# Altium PCB PCB.PcbDoc
Units mm, origin at the board's own origin, x right, y up, seen from the top; angles counter-clockwise.
Board outline 54.94 x 41.1 mm, 2 copper layers (Top Layer, Bottom Layer); 39 components, 25 nets, 145 pads, 84 vias.
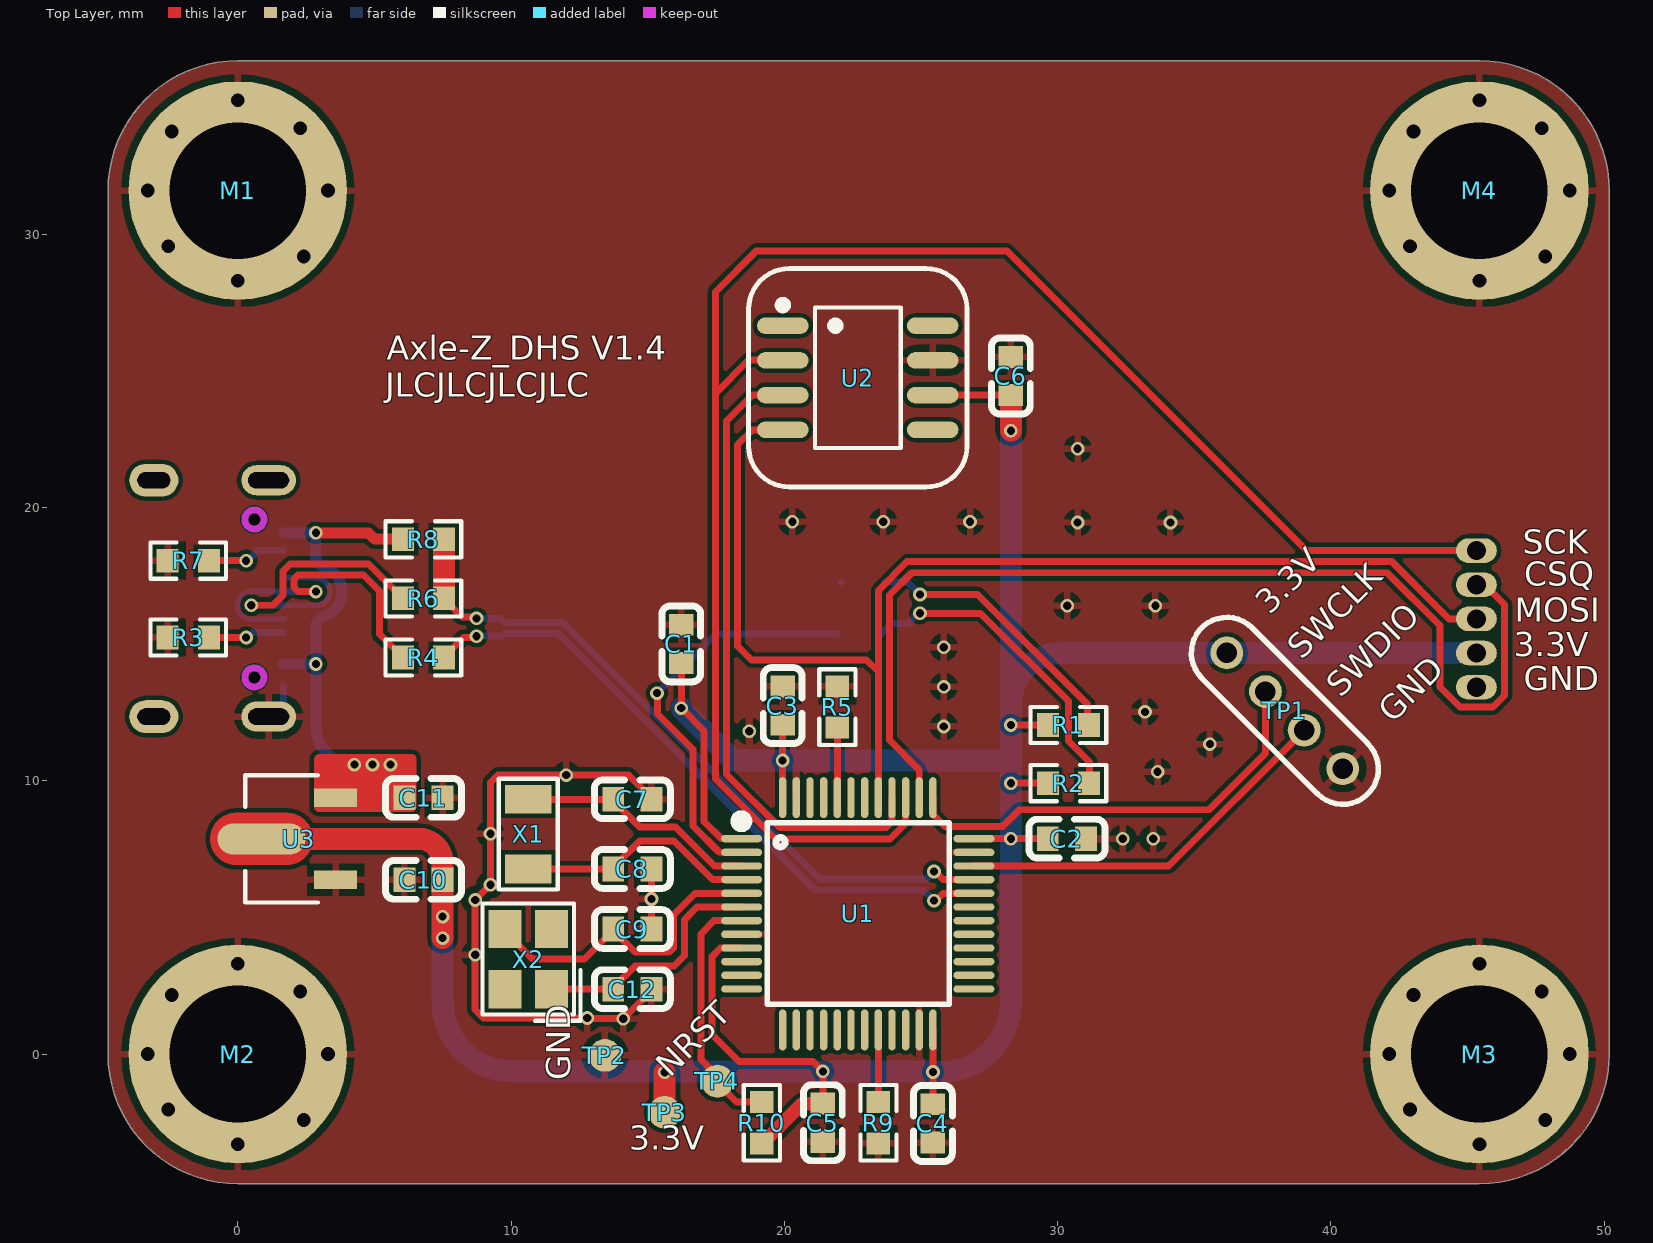
[diagram p0: Top Layer view]
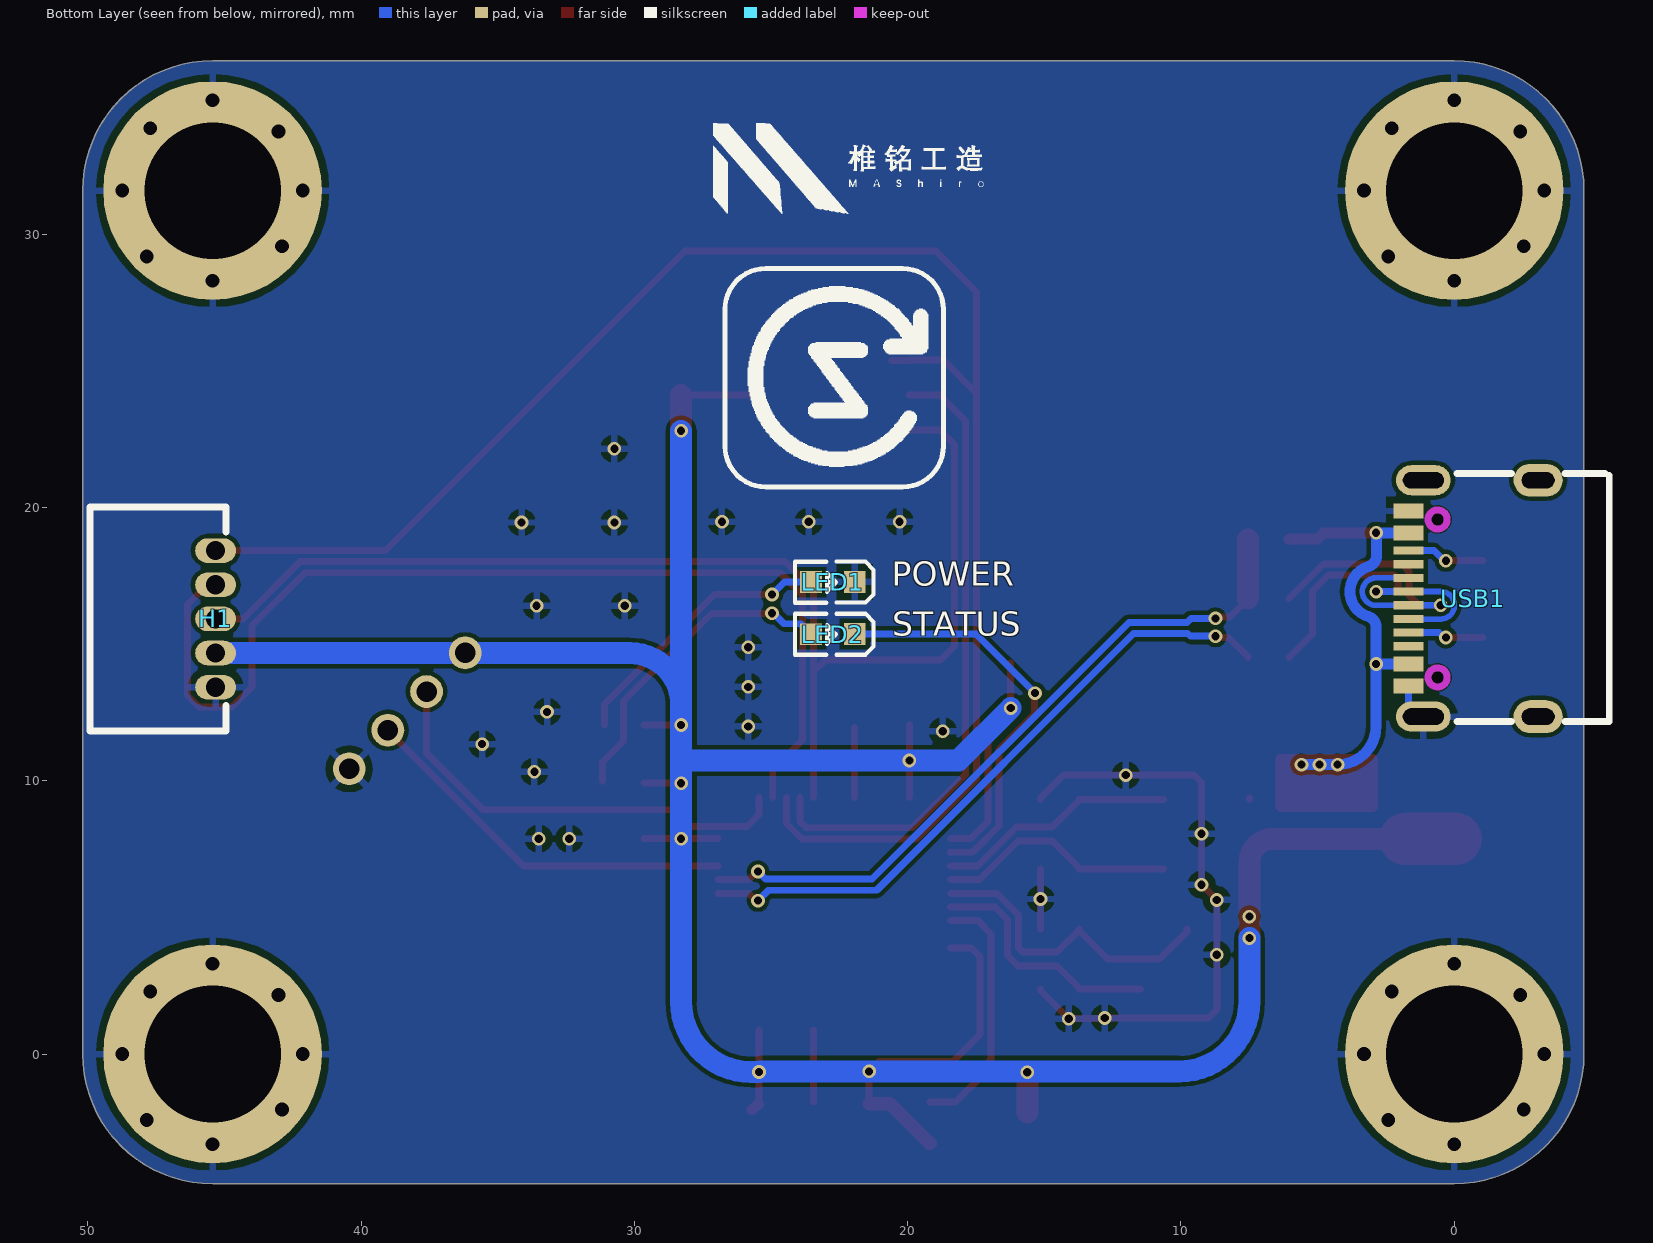
[diagram p1: Bottom Layer view, seen from below]
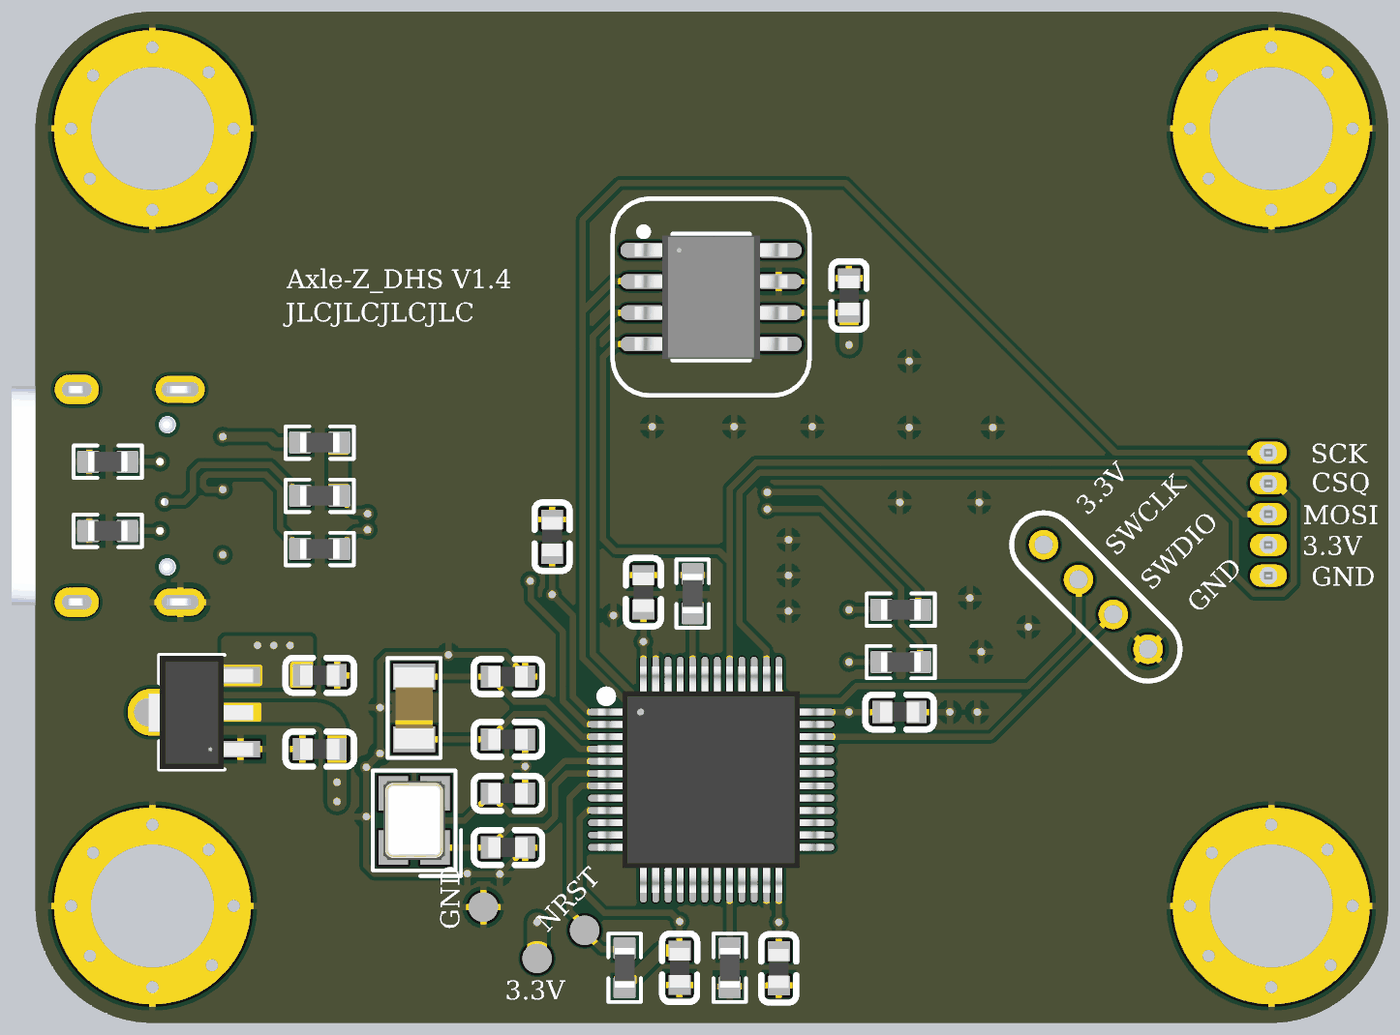
[diagram p2: 3D render of the assembled board from above, using the file's embedded part models]
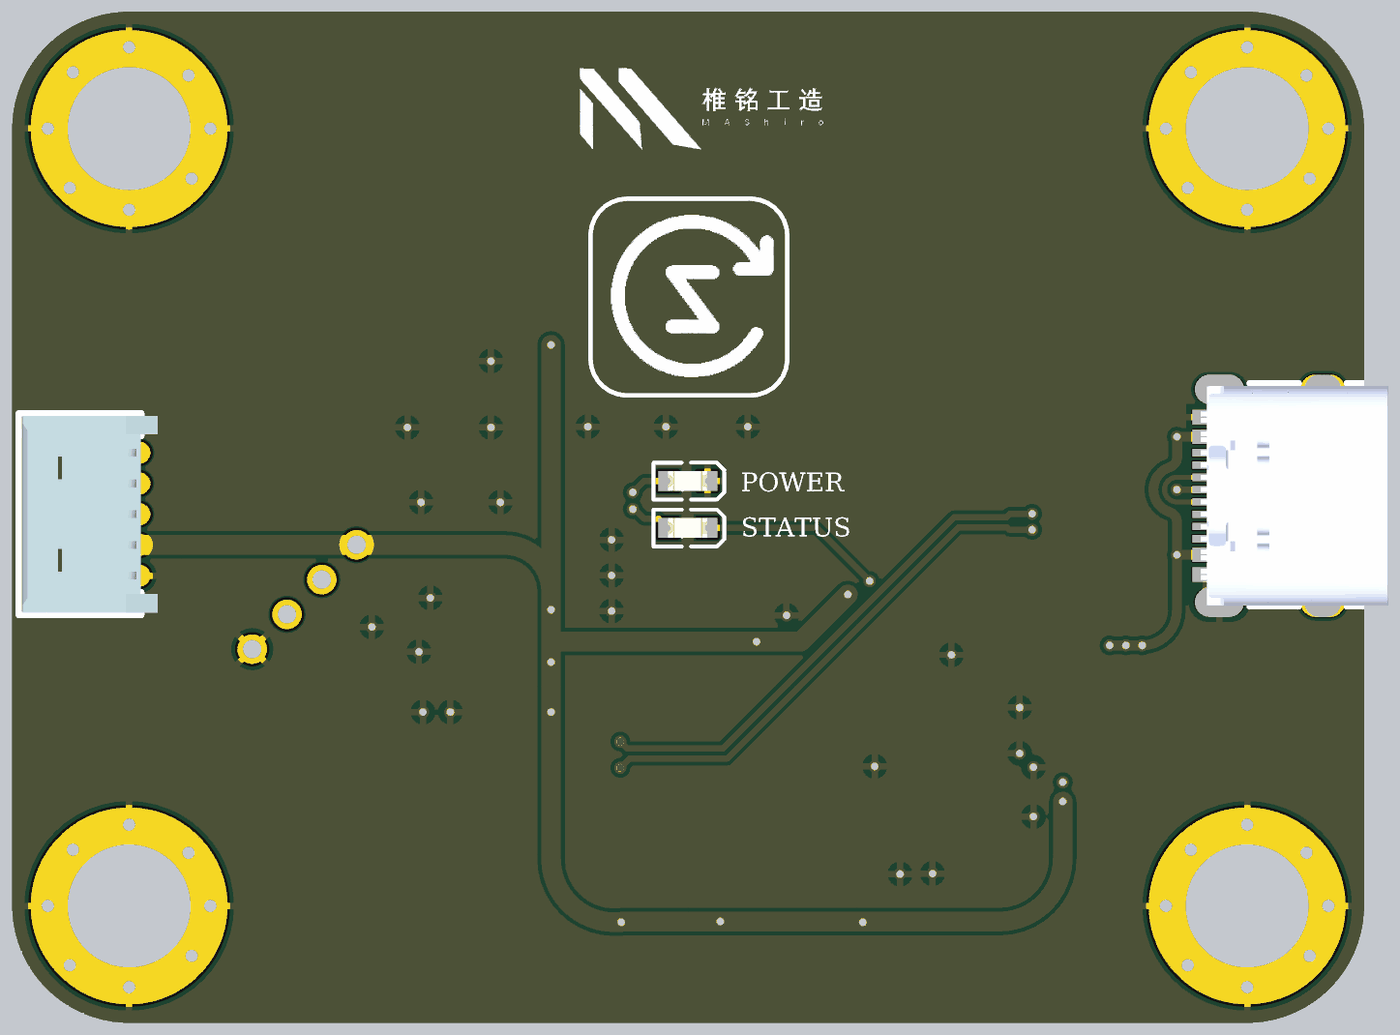
[diagram p3: 3D render of the assembled board from below, using the file's embedded part models]

## Layer stack, top to bottom
Top Solder: solder mask 0.0102, Solder Resist, Dk 3.5
Top Layer: signal copper 0.0356
Dielectric 1: dielectric 0.32, FR-4, Dk 4.8
Bottom Layer: signal copper 0.0356
Bottom Solder: solder mask 0.0102, Solder Resist, Dk 3.5

## Board outline
-4.75,0 -4.75,31.6 cw(c0,31.6) 0,36.35 45.439,36.35 cw(c45.439,31.6) 50.189,31.6 50.189,0 cw(c45.439,0) 45.439,-4.75 0,-4.75 cw(c0,0)

## Design rules (kind name [scope] priority, off if disabled: settings)
Clearance [All] p1: gap=0.152 ignorepadtopadclearanceinfootprint=FALSE
PolygonConnect [All] p1: connectstyle=Relief reliefconductorwidth=0.254 reliefentries=4 polygonreliefangle="90 Angle" airgapwidth=0.254
RoutingVias [All] p1: holewidth=0.711 width=1.27 viastyle="Through Hole" minholewidth=0.711 minwidth=1.27 maxholewidth=0.711 maxwidth=1.27
SolderMaskExpansion [All] p1: expansion=0.102 istentingtop=FALSE
Width [All] p1: maxlimit=5.08 minlimit=0.203 preferedwidth=0.254
30 further rules are at their usual default settings.

## Components (designator, comment, footprint, x,y, rotation, side; value= is the part's Value field where it differs from the comment)
C1 "100nF" C_0603_l 16.231,15.011 r90 top
C2 "100nF" C_0603_l 30.342,7.882 r0 top
C3 "100nF" C_0603_l 19.939,12.751 r270 top
C4 "100nF" C_0603_l 25.439,-2.54 r90 top
C5 "100nF" C_0603_l 21.411,-2.515 r90 top
C6 "100nF" C_0603_l 28.291,24.815 r90 top
C7 "12pF" C_0603_l 14.438,9.322 r0 top
C8 "12pF" C_0603_l 14.438,6.772 r0 top
C9 "20pF" C_0603_l 14.438,4.575 r0 top
C10 "22uF" C_0603_l 6.794,6.375 r0 top
C11 "10uF" C_0603_l 6.794,9.375 r180 top
C12 "20pF" C_0603_l 14.438,2.375 r0 top
H1 "Header_1.25_5P" PH_1.25_5P 45.326,15.925 r270 bottom
LED1 "RED" LED_0603 22.739,17.273 r0 bottom
LED2 "GREEN" LED_0603 22.739,15.368 r0 bottom
M1 "M5" M5 0,31.6 r0 top
M2 "M5" M5 0,0 r0 top
M3 "M5" M5 45.439,0 r0 top
M4 "M5" M5 45.439,31.6 r0 top
R1 "4.7K" R_0603_L 30.396,12.041 r0 top
R2 "4.7K" R_0603_L 30.396,9.911 r0 top
R3 "5.1K" R_0603_L -1.812,15.246 r0 top
R4 "22R" R_0603_L 6.794,14.511 r180 top
R5 "10K" R_0603_L 21.939,12.697 r90 top
R6 "22R" R_0603_L 6.794,16.673 r180 top
R7 "5.1K" R_0603_L -1.812,18.056 r0 top
R8 "4.7K" R_0603_L 6.794,18.836 r0 top
R9 "10K" R_0603_L 23.444,-2.515 r270 top
R10 "10K" R_0603_L 19.177,-2.515 r270 top
TP1 "TP_2.0_4Pin" TP_2.0_4PIN_HOLE 40.438,10.439 r135 top
TP2 "TP_PIN" TP_PIN_1.2 13.437,-0.051 r90 top
TP3 "TP_PIN" TP_PIN_1.2 15.621,-2.134 r90 top
TP4 "TP_PIN" TP_PIN_1.2 17.551,-0.991 r90 top
U1 "STM32F103C8T6" LQFP_48 22.689,5.132 r270 top
U2 "TLE5012BE1000" SO-8 22.689,24.75 r270 top
U3 "AZ1117CR-3.3TRG1" SOT_89_3 2.222,7.875 r0 top
USB1 "Type-C_16PIN_SMD" Type-C_16PIN_SMD -0.699,16.673 r90 bottom
X1 "32.768Khz" SMD_L3.2_W1.5_2P 10.628,8.047 r90 top
X2 "8Mhz" SMD_L3.2_W2.5_4P 10.628,3.475 r90 top

## Footprints (in the part's own frame and the unit in brackets; to place one, negate y for a bottom-side part, rotate by r counter-clockwise, add the part's x,y. Pads: shape width x height; smd on the part's side, far side on the other; paste and mask are expansions set on the pad)
C_0603_l [mm] "MLCC 贴片电容"
  rect 0.8x0.9 smd: 1(-0.7,0) 2(0.7,0)
  silkscreen extent -1.39,-0.71 1.39,0.71, body extent -0.8,-0.41 0.8,0.41, height 0.71
LED_0603 [mm] "贴片 发光二极管"
  rect 0.8x0.8 smd: 1(-0.8,-0.003) 2(0.8,0.003)
  silkscreen extent -1.49,-0.75 1.39,0.76, body extent -0.8,-0.4 0.8,0.4, height 0.55
LQFP_48 [mm] "7mm * 7mm"
  oval 0.27x1.5 smd paste+0 mask+0.05: 1(-2.75,-4.25) 2(-2.25,-4.25) 3(-1.75,-4.25) 4(-1.25,-4.25) 5(-0.75,-4.25) 6(-0.25,-4.25) 7(0.25,-4.25) 8(0.75,-4.25) 9(1.25,-4.25) 10(1.75,-4.25) 11(2.25,-4.25) 12(2.75,-4.25) 25(2.75,4.25) 26(2.25,4.25) 27(1.75,4.25) 28(1.25,4.25) 29(0.75,4.25) 30(0.25,4.25) 31(-0.25,4.25) 32(-0.75,4.25) 33(-1.25,4.25) 34(-1.75,4.25) 35(-2.25,4.25) 36(-2.75,4.25)
  oval 1.5x0.27 smd paste+0 mask+0.05: 13(4.25,-2.75) 14(4.25,-2.25) 15(4.25,-1.75) 16(4.25,-1.25) 17(4.25,-0.75) 18(4.25,-0.25) 19(4.25,0.25) 20(4.25,0.75) 21(4.25,1.25) 22(4.25,1.75) 23(4.25,2.25) 24(4.25,2.75) 37(-4.25,2.75) 38(-4.25,2.25) 39(-4.25,1.75) 40(-4.25,1.25) 41(-4.25,0.75) 42(-4.25,0.25) 43(-4.25,-0.25) 44(-4.25,-0.75) 45(-4.25,-1.25) 46(-4.25,-1.75) 47(-4.25,-2.25) 48(-4.25,-2.75)
  silkscreen extent -3.59,-4.46 3.3,3.34, body extent -4.6,-4.6 4.6,4.6, height 1.6
M5 [mm] "M5 螺丝孔"
  round 8 hole 5: 1(0,0)
PH_1.25_5P [mm] "弯插 1.25 连接器"
  oval 0.9x1.5 hole 0.7: 1(-2.5,0) 2(-1.25,0) 3(0,0) 4(1.25,0) 5(2.5,0)
  silkscreen extent -4.1,-4.6 4.1,0.38, body extent -4,-4.45 4,1.05, height 3.2
R_0603_L [mm] "贴片电阻"
  rect 0.806x0.864 smd paste-100 mask+0.051: 1(-0.753,0) 2(0.753,0)
  silkscreen extent -1.39,-0.66 1.39,0.66, body extent -0.8,-0.4 0.8,0.4, height 0.55
SMD_L3.2_W1.5_2P [mm]
  rect 1.05x1.7 smd: 1(-1.275,0) 2(1.275,0)
  silkscreen extent -2.03,-1.08 2.03,1.08, body extent -1.65,-0.8 1.65,0.8, height 0.84
SMD_L3.2_W2.5_4P [mm]
  rect 1.4x1.2 smd: 1(-1.1,-0.85) 2(1.1,-0.85) 3(1.1,0.85) 4(-1.1,0.85)
  silkscreen extent -2.26,-1.91 2.03,1.68, body extent -1.6,-1.25 1.6,1.25, height 0.8
SO-8 [mm] "L5.0mm W4.0mm"
  oval 0.602x1.885 smd: 1(-1.905,-2.742) 2(-0.635,-2.742) 3(0.635,-2.742) 4(1.905,-2.742) 5(1.905,2.742) 6(0.635,2.742) 7(-0.635,2.742) 8(-1.905,2.742)
  silkscreen extent -2.81,-2.89 2.58,1.57, body extent -2.5,-3.1 2.5,3.1, height 1.76
SOT_89_3 [mm] "L4.5mm W2.5mm"
  rect 1.575x0.672 smd: 1(1.356,-1.5) 3(1.356,1.5)
  oval 3.226x1.14 smd: 2(-1.356,0)
  Top Layer region: -2.283,0.95 -0.429,0.95 -0.384,0.949 -0.34,0.946 -0.296,0.94 -0.252,0.933 -0.208,0.924 -0.165,0.912 -0.123,0.899 -0.081,0.884 -0.04,0.866 0,0.847 0.04,0.826 0.078,0.803 0.115,0.779 0.151,0.752 0.185,0.724 0.219,0.695 0.251,0.664 0.281,0.631 0.31,0.597 0.337,0.562 0.362,0.525 0.386,0.488 0.408,0.449 0.428,0.409 0.447,0.33 2.144,0.33 2.144,-0.33 0.447,-0.33 0.428,-0.409 0.408,-0.449 0.386,-0.488 0.362,-0.526 0.337,-0.562 0.31,-0.597 0.281,-0.631 0.251,-0.664 0.219,-0.695 0.185,-0.725 0.151,-0.753 0.115,-0.779 0.078,-0.804 0.04,-0.827 0,-0.848 -0.04,-0.867 -0.081,-0.884 -0.123,-0.899 -0.165,-0.913 -0.208,-0.924 -0.252,-0.934 -0.296,-0.941 -0.34,-0.946 -0.384,-0.949 -0.429,-0.95 -2.283,-0.95 -2.328,-0.949 -2.372,-0.946 -2.416,-0.941 -2.46,-0.934 -2.504,-0.924 -2.547,-0.913 -2.589,-0.899 -2.631,-0.884 -2.672,-0.867 -2.713,-0.848 -2.752,-0.827 -2.79,-0.804 -2.827,-0.779 -2.863,-0.753 -2.898,-0.725 -2.931,-0.695 -2.963,-0.664 -2.993,-0.631 -3.022,-0.597 -3.049,-0.562 -3.075,-0.526 -3.098,-0.488 -3.12,-0.449 -3.141,-0.409 -3.159,-0.369 -3.175,-0.327 -3.189,-0.285 -3.202,-0.242 -3.212,-0.199 -3.22,-0.155 -3.227,-0.111 -3.231,-0.067 -3.233,-0.022 -3.233,0.022 -3.231,0.067 -3.227,0.111 -3.22,0.155 -3.212,0.199 -3.202,0.242 -3.189,0.285 -3.175,0.327 -3.159,0.369 -3.141,0.409 -3.12,0.449 -3.098,0.488 -3.075,0.525 -3.049,0.562 -3.022,0.597 -2.993,0.631 -2.963,0.664 -2.931,0.695 -2.898,0.724 -2.863,0.752 -2.827,0.779 -2.79,0.803 -2.752,0.826 -2.713,0.847 -2.672,0.866 -2.631,0.884 -2.589,0.899 -2.547,0.912 -2.504,0.924 -2.46,0.933 -2.416,0.94 -2.372,0.946 -2.328,0.949 -2.283,0.95
  silkscreen extent -1.95,-2.33 0.7,2.33, body extent -2.37,-2.31 1.87,2.29, height 1.65
TP_2.0_4PIN_HOLE [mm] "4pin 2.0mm 间距测试点 通孔"
  round 1.2 hole 0.75: 1(0,0) 2(2,0) 3(4,0) 4(6,0)
  silkscreen extent -1.3,-1.3 7.3,1.3
TP_PIN_1.2 [mm] "单点测试点"
  round 1.2 smd: 1(0,0)
Type-C_16PIN_SMD [mm] "Type-C 卧贴"
  rect 0.55x1.1 smd paste-100 mask+0.05: 1(-3.2,2.375) 2(-2.4,2.375) 11(2.4,2.375) 12(3.2,2.375)
  rect 0.3x1.1 smd paste-100 mask+0.05: 3(-1.75,2.375) 4(-1.25,2.375) 5(-0.75,2.375) 6(-0.25,2.375) 7(0.25,2.375) 8(0.75,2.375) 9(1.25,2.375) 10(1.75,2.375)
  oval 1.2x1.8 hole 0.6 slot 1.2 at 90 deg paste+0 mask+0.05: 13(-4.325,-2.375) 14(4.325,-2.375)
  oval 1.1x2 hole 0.6 slot 1.5 at 90 deg paste+0 mask+0.05: 13(-4.325,1.825) 14(4.325,1.825)
  Keep-Out Layer board cut-out: -2.54,1.305 -2.541,1.374 -2.595,1.5 -2.694,1.597 -2.821,1.649 -2.959,1.649 -3.086,1.597 -3.184,1.5 -3.239,1.374 -3.24,1.305 -3.239,1.236 -3.184,1.11 -3.086,1.013 -2.959,0.961 -2.821,0.961 -2.694,1.013 -2.595,1.11 -2.541,1.236 -2.54,1.305 -2.54,1.305
  Keep-Out Layer board cut-out: 3.24,1.305 3.239,1.374 3.185,1.5 3.086,1.597 2.959,1.649 2.821,1.649 2.694,1.597 2.596,1.5 2.541,1.374 2.54,1.305 2.541,1.236 2.596,1.11 2.694,1.013 2.821,0.961 2.959,0.961 3.086,1.013 3.185,1.11 3.239,1.236 3.24,1.305 3.24,1.305
  Keep-Out Layer circle w0.025: c-2.89,1.305 r0.35
  Keep-Out Layer circle w0.254: c-2.89,1.305 r0.35
  Keep-Out Layer circle w0.025: c2.89,1.305 r0.35
  Keep-Out Layer circle w0.254: c2.89,1.305 r0.35
  silkscreen extent -4.5,-4.97 4.57,0.6, body extent -4.47,-5.01 4.47,2.58, height 3.26

## Part data
C1 C2 C3 C4 C5 C6 C7 C8 C9 C10 C11 C12: library part C, "MLCC 贴片独石电容", BOM_Name="贴片 MCLL"
H1: "1.25mm 接插件", BOM_Name=接插件
LED1 LED2: library part SMD_LED, "贴片发光二极管", BOM_Name=LED
M1 M2 M3 M4: "M5 螺丝安装孔"
R1 R2 R3 R4 R5 R6 R7 R8 R9 R10: library part R, "贴片电阻", BOM_Name=贴片电阻
TP1: "2.0mm 间距调试点"
TP2 TP3 TP4: "单点测试点"
U2: "采用巨磁电阻的角度传感器", BOM_Name=角度传感器
U3: "3.3V 线性稳压器", BOM_Name=LDO
USB1: "16Pin 卧贴 Type-C USB 连接器", BOM_Name="Type-C 连接器"
X1: library part 无源晶振-32.768K-2P, "32.768Khz 两脚 无源 贴片晶振", BOM_Name=贴片晶振
X2: library part 无源晶振-8Mhz-4P, "8Mhz 四脚 无源 贴片晶振", BOM_Name=贴片晶振

## Via types
v1: diameter 0.5, hole 0.3, Top Layer to Bottom Layer, 52 vias
v2: diameter 0.61, hole 0.5, Top Layer to Bottom Layer, 32 vias

## Nets (pads, with @x,y where several pads share a name; then routed paths per layer and width w, separated by ;. In a path a pad name is that pad's centre, name@x,y a point inside that pad or via, vN(x,y) a via of type N, cw(c..) or ccw(c..) an arc to the next point about the centre after c; other vN are vias at no path point)
3.3V: C1.1 C2.1 C3.2 C4.2 C5.2 C6.1 C10.2 H1.4 R1.1 R2.1 R10.2 TP1.4 TP3.1 U1.1 U1.9 U1.24 U1.36 U1.48 U2.6 U3.2 | length 125
  Top Layer w0.254: C1.1 v1(16.231,12.66) 17.069,11.822 17.069,8.509 17.693,7.885 18.436,7.885 U1.1 ; U1.9 18.436,3.879 17.671,3.879 17.352,3.56 17.352,0.708 18.339,-0.279 21.055,-0.279 v1(21.411,-0.635) C5.2 ; U1.48 v1(19.939,10.744) C3.2 ; U2.6 C6.1 ; U1.24 v1(25.439,-0.66) 25.439,-1.828 C4.2@25.451,-1.84 ; U1.36 v1(28.291,7.882) C2.1 ; v1(28.291,9.911) R2.1 ; v1(28.291,12.041) R1.1
  Top Layer w0.4: C4.2@25.451,-1.84 25.501,-1.84 C4.2@25.701,-2.04
  Top Layer w0.5: R10.2 19.206,-3.268 20.659,-1.815 C5.2
  Top Layer w0.8: U3.2 6.629,7.875 cw(c6.629,7.009) 7.494,7.009 C10.2 v1(7.494,5.029) v1(7.494,4.242) ; TP3.1 v1(15.621,-0.666) ; v1(28.291,22.809) C6.1
  Bottom Layer w0.8: v1(7.494,4.242) 7.494,1.93 ccw(c10.059,1.93) 10.059,-0.635 v1(21.411,-0.635) v1@25.414,-0.635 ; v1(16.231,12.66) 18.147,10.744 v1(19.939,10.744) 28.291,10.744 ; v1(25.439,-0.66) 25.725,-0.66 ccw(c25.725,1.905) 28.291,1.905 v1(28.291,7.882) v1(28.291,9.911) 28.291,10.744 ; v1(28.291,22.809) 28.291,12.797 ; H1.4 36.2,14.675 30.169,14.675 ccw(c30.169,12.797) 28.291,12.797 ; 28.291,10.744 v1(28.291,12.041) 28.291,12.797
5V: C11.2 R8.1 U3.3 USB1.2 USB1.11 | length 17.1
  Top Layer w0.4: v1(2.857,19.075) 4.775,19.075 5.004,18.847 6.03,18.847 R8.1
  Bottom Layer w0.4: USB1.2 v1(2.857,14.273) ; USB1.11 1.676,19.075 v1@2.845,19.075 ; v1(2.857,19.075) v1@2.845,19.075 ; v1(5.588,10.592) v1(4.928,10.592) v1(4.267,10.592) cw(c4.267,12.002) 2.857,12.002 v1(2.857,14.273) ; v1@2.845,19.075 2.845,18.236 ccw(c3.262,18.238) 3.141,17.838 cw(c2.857,16.923) 3.138,16.008 ccw(c3.257,15.626) 2.857,15.627 v1(2.857,14.273)
A_CSQ: H1.2 U1.38 | length 38.9
  Top Layer w0.254: U1.38 24.939,10.392 23.846,11.486 23.846,16.794 24.664,17.613 42.061,17.613 43.993,15.681 43.993,13.427 44.724,12.696 45.928,12.696 46.355,13.123 46.355,16.446 45.626,17.175 H1.2
B_CSQ: U1.40 U2.3 | length 23.2
  Top Layer w0.254: U2.3 18.832,24.115 17.882,23.165 17.882,10.238 19.839,8.28 23.698,8.28 23.936,8.518 23.936,9.379 U1.40
DN: R4.1 U1.32 | length 23.9
  Top Layer w0.254: R4.1 7.547,14.54 8.251,15.244 8.691,15.244 v1(8.738,15.291) ; v1(25.476,5.613) 25.54,5.613 25.808,5.882 U1.32
  Bottom Layer w0.254: v1(8.738,15.291) 9.652,15.291 9.754,15.392 11.735,15.392 21.133,5.994 25.095,5.994 v1(25.476,5.613)
DP: R6.1 R8.2 U1.33 | length 26.1
  Top Layer w0.254: R6.1 7.547,16.645 8.202,15.99 8.691,15.99 v1(8.738,15.943) ; v1(25.476,6.68) 25.51,6.68 25.808,6.382 U1.33
  Top Layer w0.8: R6.1 R8.2
  Bottom Layer w0.254: v1(8.738,15.943) 9.635,15.943 9.779,15.799 11.903,15.799 21.301,6.401 25.197,6.401 v1(25.476,6.68)
GND: C1.2 C2.2 C3.1 C4.1 C5.1 C6.2 C7.2 C8.2 C9.2 C10.1 C11.1 C12.2 H1.5 LED1.1 M1.1 M2.1 M3.1 M4.1 R3.1 R5.2 R7.1 R9.2 TP1.1 TP2.1 U1.8 U1.23 U1.35 U1.47 U2.7 U3.1 USB1.1 USB1.12 USB1.13@1.126,12.348 | length 25.7
  Top Layer w0.254: C11.1@7.494,9.325 C11.1 ; v1@12.787,1.295 v1(14.108,1.295) 15.138,2.325 C12.2 ; v1(12.787,1.316) 8.996,1.316 8.687,1.626 v1(8.687,5.639) v1(9.246,6.198) 9.246,9.931 9.521,10.206 v1(12.022,10.206) 14.304,10.206 15.138,9.372 C7.2 ; C9.2 C8.2
  Bottom Layer w0.254: USB1.13@1.126,12.348 1.285,12.348 1.676,12.739 USB1.1 ; LED1.1@22.086,17.273 LED1.1@22.09,17.276
  other v1: 8.687,3.632 15.138,5.674 32.385,7.882 33.499,7.882 9.246,8.064 33.661,10.332 35.574,11.343 18.72,11.811 25.832,11.989 33.198,12.522 25.832,13.437 25.832,14.884 30.353,16.408 33.579,16.408 30.734,19.452 34.13,19.452 20.295,19.482 23.622,19.482 26.797,19.482 30.734,22.149
  other v2: 0,-3.302 45.439,-3.302 2.413,-2.413 47.852,-2.413 -2.54,-2.032 42.899,-2.032 -3.302,0 3.302,0 42.137,0 48.741,0 -2.413,2.159 43.026,2.159 2.286,2.286 47.725,2.286 0,3.302 45.439,3.302 0,28.298 45.439,28.298 2.413,29.187 47.852,29.187 -2.54,29.568 42.899,29.568 -3.302,31.6 3.302,31.6 42.137,31.6 48.741,31.6 -2.413,33.759 43.026,33.759 2.286,33.886 47.725,33.886 0,34.902 45.439,34.902
MOSI: H1.3 U1.41 U2.4 | length 45.6
  Top Layer w0.254: U2.4 18.832,22.845 18.288,22.301 18.288,14.935 18.796,14.427 23.012,14.427 23.439,14 ; U1.41 23.439,14 ; H1.3 44.323,15.925 42.23,18.019 24.496,18.019 23.439,16.962 23.439,14
NetLED1_2: LED1.2 R1.2 | length 10
  Top Layer w0.254: v1(24.968,16.815) 27.076,16.815 31.09,12.802 R1.2@31.09,12.047
  Bottom Layer w0.254: LED1.2@23.689,17.27 23.692,17.273 24.51,17.273 v1(24.968,16.815)
NetLED2_2: LED2.2 R2.2 | length 11.8
  Top Layer w0.254: v1(24.968,16.129) 27.187,16.129 30.404,12.913 30.404,11.455 31.167,10.692 R2.2@31.167,9.982
  Bottom Layer w0.254: LED2.2 23.922,15.748 24.521,15.748 24.902,16.129 v1(24.968,16.129)
NetR3_2: R3.2 USB1.4 | length 2.8
  Top Layer w0.254: R3.2 v1(0.305,15.246)
  Bottom Layer w0.254: v1(0.305,15.246) 0.371,15.246 0.549,15.424 USB1.4
NetR4_2: R4.2 USB1.5 USB1.7 | length 12.5
  Top Layer w0.254: v1(2.857,16.923) 2.206,16.923 2.057,17.072 2.057,17.377 2.206,17.526 4.597,17.526 5.182,16.942 5.182,15.37 R4.2
  Bottom Layer w0.203: USB1.5 1.672,15.919 0.495,15.919 cw(c0.495,16.423) 0.495,16.927 1.672,16.927 USB1.7
  Bottom Layer w0.254: USB1.7 v1(2.857,16.923) ; v1@2.841,16.908 v1@2.857,16.892
NetR5_1: R5.1 U1.44 | length 2.6
  Top Layer w0.254: U1.44 R5.1
NetR6_2: R6.2 USB1.6 USB1.8 | length 12.4
  Top Layer w0.254: v1@0.495,16.455 v1(0.495,16.423) 1.285,16.423 1.651,16.789 1.651,17.669 1.914,17.932 4.782,17.932 R6.2
  Bottom Layer w0.203: USB1.8 1.68,17.427 2.857,17.427 cw(c2.857,16.923) 2.857,16.419 USB1.6@1.68,16.419
  Bottom Layer w0.254: v1(0.495,16.423) USB1.6 USB1.6@1.68,16.419
NetR7_2: R7.2 USB1.10 | length 2.9
  Top Layer w0.254: R7.2 v1(0.305,18.056)
  Bottom Layer w0.254: v1(0.305,18.056) 0.371,18.056 0.739,18.424 USB1.10
NetR9_1: R9.1 U1.20 | length 2.6
  Top Layer w0.254: U1.20 23.439,-1.756 R9.1
NRST: R10.1 TP4.1 U1.7 | length 9.3
  Top Layer w0.254: U1.7 17.433,4.882 16.945,4.394 16.945,-0.205 17.297,-0.557 17.297,-0.813 18.246,-1.761 R10.1
OSC_IN: C9.1 U1.5 X2.3 | length 11.6
  Top Layer w0.254: X2.3 9.778,4.475 10.778,3.475 12.688,3.475 C9.1@13.738,4.525 ; C9.1 C9.1@13.738,4.525 ; U1.5 16.728,5.882 15.937,5.091 15.937,3.878 15.788,3.729 14.534,3.729 C9.1@13.738,4.525
OSC_OUT: C12.1 U1.6 X2.1 | length 9
  Top Layer w0.254: X2.1 C12.1 13.738,2.425 14.534,3.221 15.962,3.221 16.343,3.602 16.343,4.913 16.812,5.382 U1.6
PC14: C7.1 U1.3 X1.2 | length 8.9
  Top Layer w0.254: X1.2 C7.1 13.738,9.272 14.709,8.301 16.023,8.301 17.442,6.882 U1.3
PC15: C8.1 U1.4 X1.1 | length 8.8
  Top Layer w0.254: X1.1 C8.1 13.738,6.822 14.709,7.793 15.956,7.793 17.367,6.382 U1.4
SCK: H1.1 U1.39 U2.2 | length 63.5
  Top Layer w0.254: U2.2@20.588,25.385 U2.2 19.932,25.4 18.694,25.4 17.475,24.181 ; U1.39 24.436,9.379 24.436,8.444 23.867,7.874 19.671,7.874 17.475,10.07 17.475,24.181 ; H1.1 39.106,18.425 28.143,29.388 18.974,29.388 17.475,27.889 17.475,24.181
STATUS_LED: LED2.1 U1.2 | length 15.1
  Top Layer w0.254: v1(15.342,13.208) 15.363,13.187 15.363,12.45 16.662,11.151 16.662,8.341 17.618,7.385 18.436,7.385 U1.2
  Bottom Layer w0.254: v1(15.342,13.208) 17.505,15.371 LED2.1
SWCLK: TP1.3 U1.37 | length 16.3
  Top Layer w0.254: U1.37 25.439,8.767 25.875,8.331 27.991,8.331 28.601,8.941 35.548,8.941 37.615,11.007 TP1.3@37.615,13.261
SWDIO: TP1.2 U1.34 | length 14.1
  Top Layer w0.254: U1.34 34.064,6.882 TP1.2@39.029,11.847
pads on no net: U1.10 U1.11 U1.12 U1.13 U1.14 U1.15 U1.16 U1.17 U1.18 U1.19 U1.21 U1.22 U1.25 U1.26 U1.27 U1.28 U1.29 U1.30 U1.31 U1.42 U1.43 U1.45 U1.46 U2.1 U2.5 U2.8 USB1.3 USB1.9 USB1.13@-3.074,12.348 USB1.14 X2.2 X2.4

## Polygon pours and split planes (outlines as drawn)
GND on Top Layer "GND_L01_P000" (solid, pour order 0): -4.75,0 -4.75,31.6 cw(c0,31.6) 0,36.35 45.439,36.35 cw(c45.439,31.6) 50.189,31.6 50.189,0 cw(c45.439,0) 45.439,-4.75 0,-4.75 cw(c0,0)
GND on Bottom Layer "GND_L02_P001" (solid, pour order 1): -4.75,0 -4.75,31.6 cw(c0,31.6) 0,36.35 45.439,36.35 cw(c45.439,31.6) 50.189,31.6 50.189,0 cw(c45.439,0) 45.439,-4.75 0,-4.75 cw(c0,0)

## Other copper
Top Layer:
  region net 5V: 2.794,9.042 ccw(c2.972,9.042) 2.972,8.865 6.35,8.865 ccw(c6.35,9.042) 6.528,9.042 6.528,10.82 ccw(c6.375,10.82) 6.375,10.973 2.997,10.973 ccw(c2.997,10.77) 2.794,10.77

## Silkscreen, mask and mechanical layers (free items; w line width, h text height)
Top Overlay:
  lines w0.18: 18.689,22.25 ccw(c20.189,22.25) 20.189,20.75 25.189,20.75 ccw(c25.189,22.25) 26.689,22.25 26.689,27.25 ccw(c25.189,27.25) 25.189,28.75 20.189,28.75 ccw(c20.189,27.25) 18.689,27.25 18.689,22.25
  text "Axle-Z_DHS V1.4" at 5.447,25.108 h1.5
  text "JLCJLCJLCJLC" at 5.398,23.76 h1.5
  text "SCK" at 47.03,18.02 h1.5
  text "CSQ" at 47.072,16.841 h1.5
  text "3.3V" at 37.966,15.847 h1.5 r45
  text "MOSI" at 46.725,15.52 h1.5
  text "3.3V" at 46.693,14.27 h1.5
  text "SWCLK" at 39.137,14.188 h1.5 r45
  text "GND" at 47.065,13.02 h1.5
  text "SWDIO" at 40.57,12.793 h1.5 r45
  text "GND" at 42.472,11.867 h1.5 r45
  text "GND" at 12.461,-0.953 h1.5 r90
  text "NRST" at 16.03,-1.105 h1.5 r45
  text "3.3V" at 14.321,-3.8 h1.5
Bottom Overlay:
  drawing of 28 lines, arcs and shapes, not listed
  text "POWER" at 20.586,16.852 h1.5
  text "STATUS" at 20.574,15.023 h1.5
Mechanical 1:
  lines w0.254: -4.763,0.001 ccw(c0,0) -0.013,-4.763 45.452,-4.763 ; -4.748,0.016 -4.748,31.6 cw(c0,31.6) 0,36.348 45.414,36.348 ; 45.439,36.374 cw(c45.439,31.6) 50.213,31.6 50.213,0.01 ; 45.453,-4.764 ccw(c45.439,0) 50.203,0